# Altium PCB PCB1.PcbDoc
Units mil, origin at the board's own origin, x right, y up, seen from the top; angles counter-clockwise.
Board outline 3690.03 x 3075.03 mil, 2 copper layers (Top Layer, Bottom Layer); 36 components, 50 nets, 286 pads, 56 vias.
Unrouted connection lines stored in the file: 4.
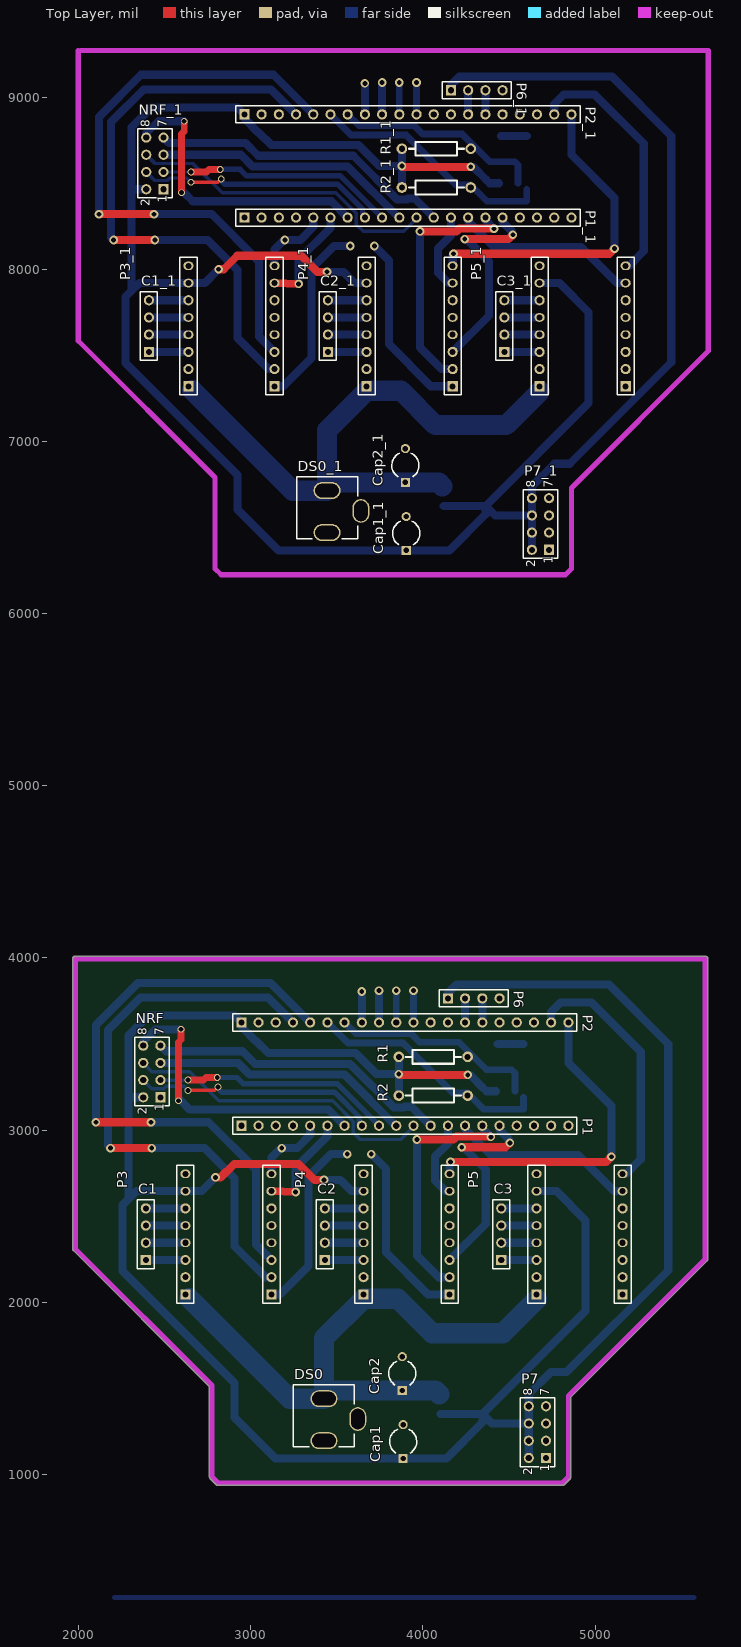
[diagram p0: Top Layer view]
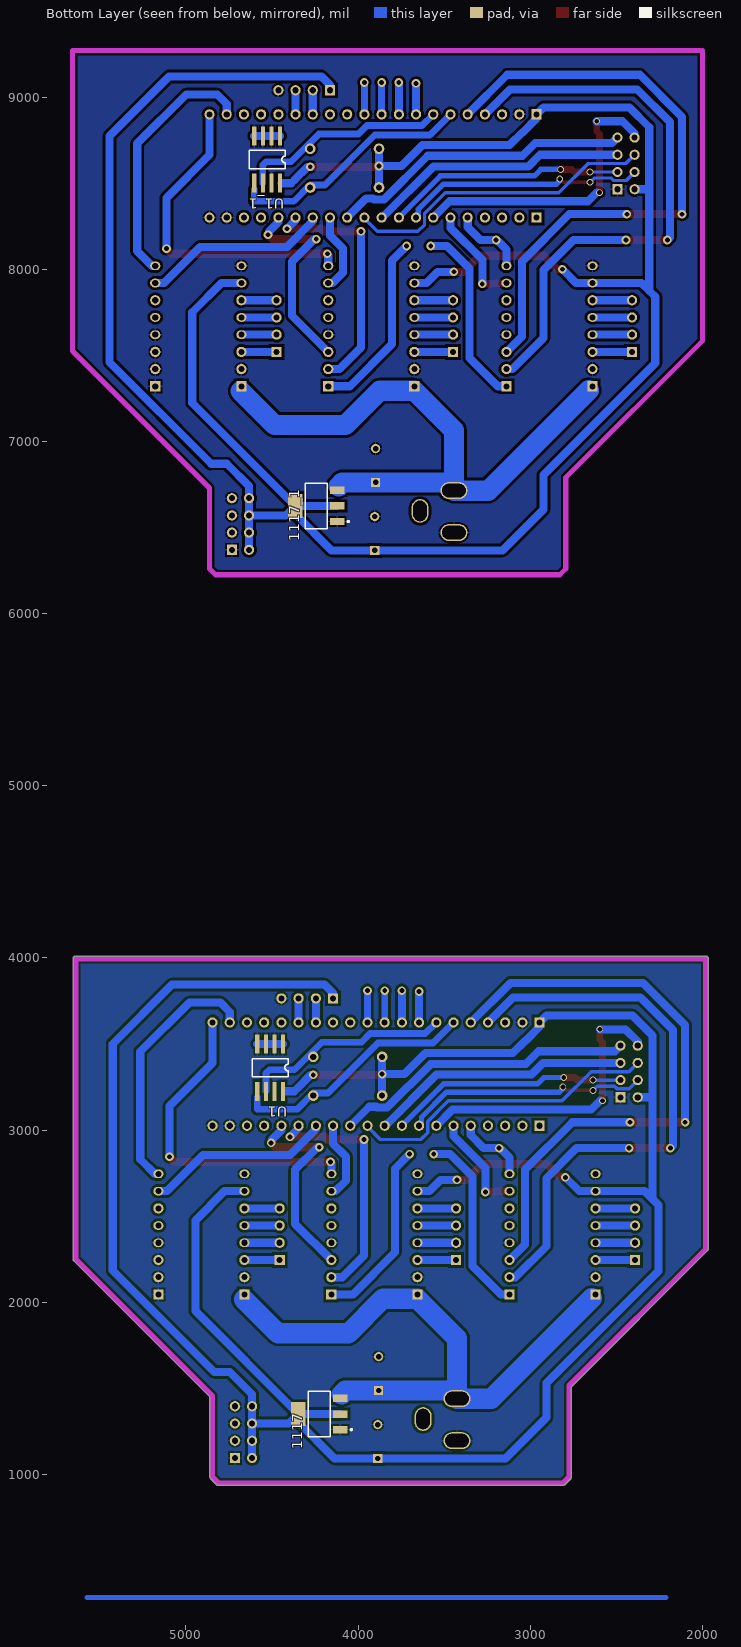
[diagram p1: Bottom Layer view, seen from below]

## Layer stack, top to bottom
Top Solder: solder mask 0.4, Solder Resist, Dk 3.5
Top Layer: signal copper 1.4
Dielectric 1: dielectric 12.6, FR-4, Dk 4.8
Bottom Layer: signal copper 1.4
Bottom Solder: solder mask 0.4, Solder Resist, Dk 3.5

## Board outline
2759.99,985 ccw(c2775,985) 2764.4,974.37 2764.38,974.38 2799.38,939.38 2799.37,939.4 ccw(c2810,950) 2810,934.99 3880,934.99 ccw(c3880,950) 3885,935.84 ccw(c3890,950) 3890,934.99 4810,934.99 ccw(c4810,950) 4820.63,939.4 4820.62,939.38 4855.62,974.38 4855.6,974.37 ccw(c4845,985) 4860.02,985 4860.02,1448.78 5650.62,2239.38 5650.6,2239.37 ccw(c5640,2250) 5655.02,2250 5655.02,3995 ccw(c5640,3995) 5640,4010.01 1995,4010.01 ccw(c1995,3995) 1987.5,4008.01 ccw(c1980,3995) 1964.98,3995 1964.98,2310 ccw(c1980,2310) 1969.4,2299.37 1969.38,2299.38 2759.99,1508.78

## Design rules (kind name [scope] priority, off if disabled: settings)
Clearance [All] p1: gap=15
PolygonConnect [All] p1: connectstyle=Relief reliefconductorwidth=10 reliefentries=4 polygonreliefangle="90 Angle" airgapwidth=10
RoutingVias [All] p1: holewidth=28 width=50 viastyle="Through Hole" minholewidth=28 minwidth=50 maxholewidth=28 maxwidth=50
SolderMaskExpansion [All] p1: expansion=4
Width [All] p1: maxlimit=118.11 minlimit=19.68 preferedwidth=47.24
30 further rules are at their usual default settings.

## Classes and differential pairs
component class Sheet1: 1117 C1 C2 C3 Cap1 Cap2 DS0 NRF P1 P2 P3 P4 P5 P6 P7 R1 R2 U1

## Components (designator, comment, footprint, x,y, rotation, side; value= is the part's Value field where it differs from the comment)
1117 "Header 4" SOT-223 4225,1350 r90 bottom
1117_1 "Header 4" SOT-223 4242.82,6625.57 r90 bottom (schematic designator 1117)
C1 "Header 4" HDR1X4 2390,2245 r90 top
C1_1 "Header 4" HDR1X4 2407.82,7520.57 r90 top (schematic designator C1)
C2 "Header 4" HDR1X4 3430,2245 r90 top
C2_1 "Header 4" HDR1X4 3447.82,7520.57 r90 top (schematic designator C2)
C3 "Header 4" HDR1X4 4455,2245 r90 top
C3_1 "Header 4" HDR1X4 4472.82,7520.57 r90 top (schematic designator C3)
Cap1 "Cap2" CAPR5-4X5 3885,1190 r90 top
Cap1_1 "Cap2" CAPR5-4X5 3902.82,6465.57 r90 top (schematic designator Cap1)
Cap2 "Cap2" CAPR5-4X5 3880,1585 r90 top
Cap2_1 "Cap2" CAPR5-4X5 3897.82,6860.57 r90 top (schematic designator Cap2)
DS0 "BATTERY" 9V 3425,1439.37 r0 top
DS0_1 "BATTERY" 9V 3442.82,6714.94 r0 top (schematic designator DS0)
NRF "Header 4X2" HDR2X4 2475,3190 r90 top
NRF_1 "Header 4X2" HDR2X4 2492.82,8465.57 r90 top (schematic designator NRF)
P1 "Header 20" HDR1X20 2945,3025 r0 top
P1_1 "Header 20" HDR1X20 2962.82,8300.57 r0 top (schematic designator P1)
P2 "Header 20" HDR1X20 2945,3625 r0 top
P2_1 "Header 20" HDR1X20 2962.82,8900.57 r0 top (schematic designator P2)
P3 "Header 8X2A" PCBComponent_1 3174,2804 r180 top
P3_1 "Header 8X2A" PCBComponent_1 3191.82,8079.57 r180 top (schematic designator P3)
P4 "Header 8X2A" PCBComponent_1 4209,2804 r180 top
P4_1 "Header 8X2A" PCBComponent_1 4226.82,8079.57 r180 top (schematic designator P4)
P5 "Header 8X2A" PCBComponent_1 5214,2804 r180 top
P5_1 "Header 8X2A" PCBComponent_1 5231.82,8079.57 r180 top (schematic designator P5)
P6 "Header 4" HDR1X4 4145,3765 r0 top
P6_1 "Header 4" HDR1X4 4162.82,9040.57 r0 top (schematic designator P6)
P7 "Header 4X2" HDR2X4 4715,1095 r90 top
P7_1 "Header 4X2" HDR2X4 4732.82,6370.57 r90 top (schematic designator P7)
R1 "Res2" R1/4 4260,3425 r180 top
R1_1 "Res2" R1/4 4277.82,8700.57 r180 top (schematic designator R1)
R2 "Res2" R1/4 4260,3200 r180 top
R2_1 "Res2" R1/4 4277.82,8475.57 r180 top (schematic designator R2)
U1 "AT24C02" SOIC8P 4435,3480 r0 bottom
U1_1 "AT24C02" SOIC8P 4452.82,8755.57 r0 bottom (schematic designator U1)

## Footprints (in the part's own frame and the unit in brackets; to place one, negate y for a bottom-side part, rotate by r counter-clockwise, add the part's x,y. Pads: shape width x height; smd on the part's side, far side on the other; paste and mask are expansions set on the pad)
9V [mm]
  oval 4x2.5 hole 2 slot 3.5 at 0 deg: 1(0,-6.207) 2(0,-0.007)
  oval 2.5x3.5 hole 2 slot 3 at 90 deg: 3(5,-3.007)
  silkscreen extent -4.5,-7.11 4.5,2.03, body extent -4.38,-13.84 5.14,0.76, height 10.92
CAPR5-4X5 [mm] "Capacitor; 2 Leads"
  rect 1.35x1.35 hole 0.8: 1(-2.5,0)
  round 1.35 hole 0.8: 2(2.5,0)
  silkscreen extent -1.69,-2 1.82,2
HDR1X4 [mm] "Connector; Header; 4 Position"
  rect 1.5x1.5 hole 0.9: 1(0,0)
  round 1.5 hole 0.9: 2(2.54,0) 3(5.08,0) 4(7.62,0)
  silkscreen extent -1.27,-1.27 8.89,1.27
HDR1X20 [mm] "Connector; Header; 20 Position"
  rect 1.5x1.5 hole 0.9: 1(0,0)
  round 1.5 hole 0.9: 2(2.54,0) 3(5.08,0) 4(7.62,0) 5(10.16,0) 6(12.7,0) 7(15.24,0) 8(17.78,0) 9(20.32,0) 10(22.86,0) 11(25.4,0) 12(27.94,0) 13(30.48,0) 14(33.02,0) 15(35.56,0) 16(38.1,0) 17(40.64,0) 18(43.18,0) 19(45.72,0) 20(48.26,0)
  silkscreen extent -1.27,-1.27 49.53,1.27
HDR2X4 [mm] "Connector; Header; 4x2 Position"
  rect 1.5x1.5 hole 0.9: 1(0,0)
  round 1.5 hole 0.9: 2(0,2.54) 3(2.54,0) 4(2.54,2.54) 5(5.08,0) 6(5.08,2.54) 7(7.62,0) 8(7.62,2.54)
  silkscreen extent -1.27,-1.27 8.89,3.81
PCBComponent_1 [mm] "Connector; Header; 8x2 Position"
  rect 1.5x1.5 hole 0.9: 1(1.372,19.279) 9(14.072,19.279)
  round 1.5 hole 0.9: 2(1.372,16.739) 3(1.372,14.199) 6(1.372,6.579) 10(14.072,16.739) 11(14.072,14.199) 14(14.072,6.579)
  oval 1.5x1.27 hole 0.9: 4(1.372,11.659) 5(1.372,9.119) 7(1.372,4.039) 8(1.372,1.499) 12(14.072,11.659) 13(14.072,9.119) 15(14.072,4.039) 16(14.072,1.499)
  silkscreen extent 0.1,0.23 15.34,20.55, body extent 0.1,0.23 15.21,20.55, height 0.7
R1/4 [mil]
  round 62 hole 35.43: 1(0,0) 2(400,0)
  silkscreen extent 40,-40 360,40
SOIC8P [mil]
  rect 24x110 smd: 1(0,-20) 2(50,-20) 3(100,-20) 4(150,-20) 5(150,255) 6(100,255) 7(50,255) 8(0,255)
  silkscreen extent -30,65 180,170, body extent -24,-4 174,234, height 63
SOT-223 [mm] "SOT-223/SC-73; 4 Leads; Body 6.7 x 7.3 mm, inc. leads (LxW max)"
  rect 1.1x2.15 smd: 1(-2.3,-3.1) 2(0,-3.1) 3(2.3,-3.1)
  rect 3.5x2.15 smd: 4(0,3.1)
  silkscreen extent -3.35,-4.85 3.35,1.63, body extent -3.25,-3.58 3.25,3.38, height 1.65

## Part data
1117 1117_1 C1 C1_1 C2 C2_1 C3 C3_1 P6 P6_1: "Header, 4-Pin"
Cap1 Cap1_1 Cap2 Cap2_1: "Capacitor"
NRF NRF_1 P7 P7_1: "Header, 4-Pin, Dual row"
P1 P1_1 P2 P2_1: "Header, 20-Pin"
P3 P3_1 P4 P4_1 P5 P5_1: "Header, 8-Pin, Dual row"
R1 R1_1 R2 R2_1: "Resistor"
U1 U1_1: "EEROM存储器"

## Via types
v1: diameter 50, hole 28, Top Layer to Bottom Layer, 44 vias
v2: diameter 39.37, hole 28, Top Layer to Bottom Layer, 12 vias

## Nets (pads, with @x,y where several pads share a name; then routed paths per layer and width w, separated by ;. In a path a pad name is that pad's centre, name@x,y a point inside that pad or via, vN(x,y) a via of type N, cw(c..) or ccw(c..) an arc to the next point about the centre after c; other vN are vias at no path point)
3V3: 1117.2 1117.4 Cap1.1 NRF.2 P1.18 P2.1 P3.15 P4.15 P5.15 P6.1 P7.2 P7.4 P7.6 P7.8 R1.2 R2.2 U1.8 | length 14843.7
  Top Layer w47.24: v1(2795,2725) 2825,2725 2903.62,2803.62 3276.38,2803.62 3370,2710 v1(3425,2710) ; v1(3860,3325) 3865,3320 v1(4260,3320)
  Bottom Layer w47.24: NRF.2 2290,3190 ; v1@2790,2720 2715,2645 P3.15 2335,2645 2290,2600 ; v1(3425,2710) 3520,2710 3585,2645 P4.15 ; R2.2 v1@3860,3310 ; R1.2 v1(3860,3325) 3730,3325 3608.31,3446.69 3101.33,3446.69 3028.03,3520 3025,3520 2945,3600 P2.1 2905,3665 2405,3665 2290,3550 2290,3190 ; 1117.2 1117.4 ; P6.1 4145,3795 4195,3845 5080,3845 5425,3500 5425,2185 4835,1595 4745,1595 4615,1465 P7.8 P7.6 ; v1(4260,3320) 4275,3320 4350,3245 ; 4370,3225 U1.8@4425,3225 ; P7.2 P7.4 P7.6 ; P5.15@4680,2645 4775,2645 4945,2475 4945,1947.95 1117.4 ; 2290,2600 2290,3190 ; 2290,2600 2255,2565 2255,2180 2905,1530 2905,1330 3143.43,1091.57 Cap1.1 4136.57,1091.57 4347.05,1302.05 1117.4 ; 1117.4 4402.05,1295 P7.6
5V: P2.3
20V: 1117.3 Cap2.1 DS0.2 P3.9 P4.9 P5.9 | length 3571.1
  Bottom Layer w118.11: P3.9@2642.5,2022.5 3225.91,1439.09 DS0.2 ; 4095,1465 4073.43,1486.57 Cap2.1 3472.48,1486.57 DS0.2 ; P5.9@4662.5,2017.5 4465,1820 4055,1820 3855,2020 3655,2020 3425,1790 DS0.2
DIRX: P1.5 P3.8 | length 416.8
  Bottom Layer w47.24: P3.8 3120,2840 v1@3170,2890 ; v1(3180,2895) 3270,2895 3345,2970 P1.5
DIRY: P2.20 P4.8 | length 1881
  Top Layer w47.24: v1(4160,2815) 5065,2815 v1(5095,2845)
  Bottom Layer w47.24: P4.8 v1@4155,2805 ; P2.20 4845,3390 5095,3140 v1@5095,2855
DIRZ: P2.19 P5.8 | length 1466
  Bottom Layer w47.24: P2.19 4745,3685 4800,3740 4980,3740 5265,3455 5265,2830 P5.8@5180,2745
GND: 1117.1 Cap1.2 Cap2.2 DS0.1 NRF.1 P1.19 P1.20 P2.2 P3.4 P3.10 P3.16 P4.4 P4.10 P4.16 P5.1 P5.2 P5.3 P5.4 P5.10 P5.16 P6.4 P7.1 P7.3 P7.5 P7.7 U1.1 U1.2 U1.3 U1.4 U1.7 | length 150
  Bottom Layer w47.24: U1.1 U1.4
NetC1_1: C1.1 P3.11 | length 230
  Bottom Layer w47.24: C1.1 P3.11
NetC1_2: C1.2 P3.12 | length 230
  Bottom Layer w47.24: C1.2 P3.12
NetC1_3: C1.3 P3.13 | length 230
  Bottom Layer w47.24: C1.3 P3.13
NetC1_4: C1.4 P3.14 | length 230
  Bottom Layer w47.24: C1.4 P3.14
NetC2_1: C2.1 P4.11 | length 225
  Bottom Layer w47.24: C2.1 P4.11
NetC2_2: C2.2 P4.12 | length 225
  Bottom Layer w47.24: C2.2 P4.12
NetC2_3: C2.3 P4.13 | length 225
  Bottom Layer w47.24: C2.3 P4.13
NetC2_4: C2.4 P4.14 | length 225
  Bottom Layer w47.24: C2.4 P4.14
NetC3_1: C3.1 P5.11 | length 205
  Bottom Layer w47.24: C3.1 P5.11
NetC3_2: C3.2 P5.12 | length 205
  Bottom Layer w47.24: C3.2 P5.12
NetC3_3: C3.3 P5.13 | length 205
  Bottom Layer w47.24: C3.3 P5.13
NetC3_4: C3.4 P5.14 | length 205
  Bottom Layer w47.24: C3.4 P5.14
NRF_CE: NRF.3 P1.9 | length 1382.8
  Top Layer w39.37: v2(2635,3290) 2725,3290 2740,3305 v2(2805,3305)
  Bottom Layer w19.68: NRF.3 v2@2625,3290
  Bottom Layer w31.5: v2(2805,3305) 2920,3305 2957.17,3267.83 3503.25,3267.83 3745,3026.09 P1.9
NRF_CSN: NRF.4 P1.8 | length 1427.7
  Top Layer w19.68: v2(2635,3230) 2790,3230 v2(2810,3250)
  Bottom Layer w19.68: NRF.4 2424.37,3240.63 2495.45,3240.63 2509.82,3255 2610,3255 v2@2630,3235
  Bottom Layer w31.5: v2(2810,3250) 2810,3240 2830,3220 3485.33,3220 3631.22,3074.11 3631.22,3038.78 P1.8
NRF_IRQ: NRF.8 P1.7 | length 1705.3
  Top Layer w39.37: v2(2580,3170) 2580,3510 2595,3525 v2(2595,3585)
  Bottom Layer w47.24: NRF.8 2375,3515 2445,3585 v2(2595,3585) ; v2@2595,3170 2645,3120 3450,3120 P1.7
NRF_MISO: NRF.7 P1.12 | length 1766.8
  Bottom Layer w47.24: NRF.7 2507.24,3457.76 2952.24,3457.76 3025.55,3384.45 3577.09,3384.45 3831.16,3130.38 3888.84,3130.38 3893.84,3135.38 3934.62,3135.38 P1.12
NRF_MOSI: NRF.6 P1.11 | length 1855.5
  Bottom Layer w19.68: NRF.6 2425.63,3339.37 2645.63,3339.37 2815,3170 3475,3170 3595.63,3049.37 3595.63,2984.37 3635,2945 3870,2945 3950,3025 P1.11 P1.11@3925,3025
NRF_SCK: NRF.5 P1.10 | length 1521.2
  Bottom Layer w47.24: NRF.5 2925,3390 2992.8,3322.2 3544.17,3322.2 3841.38,3025 P1.10
NRST: P1.17
PA1: P1.6 P3.7 | length 601.7
  Top Layer w47.24: P3.7 v1(3260,2640)
  Bottom Layer w47.24: v1(3260,2640) 3260,2780 3445,2965 P1.6
PA8: P2.16
PA9: P2.15 P6.3 | length 140
  Bottom Layer w47.24: P2.15 P6.3
PA10: P2.14 P6.2 | length 140
  Bottom Layer w47.24: P2.14 P6.2
PA11: P2.13
PA12: P2.12
PA15: P2.11 | length 185
  Bottom Layer w39.37: P2.11 v1(3945,3810)
PB0: P1.13 P4.7 | length 460.9
  Bottom Layer w47.24: P1.13 4145,2920 4070,2845 4070,2705 4130,2645 P4.7
PB1: P1.14 P5.7 | length 1084.1
  Bottom Layer w47.24: P1.14 4245,3005 4395,2855 4900,2855 5110,2645 P5.7
PB3: P2.10 | length 185
  Bottom Layer w39.37: P2.10 v1(3845,3810)
PB4: P2.9 P4.1 | length 1246.7
  Bottom Layer w47.24: v1(3700,2860) 3785,2775 3785,2290 4030,2045 P4.1 ; P2.9 v1@3745,3795
  other v1: 3745,3810
PB5: P2.8 P3.1 | length 1247.2
  Bottom Layer w47.24: P3.1 3170,2045 3335,2210 3335,2730 3465,2860 v1(3560,2860) ; P2.8 v1@3645,3790
  other v1: 3645,3805
PB6: P2.7 R1.1 U1.6 | length 1217.2
  Bottom Layer w39.37: P2.7 3610,3560 3930,3560 3980,3510 4210,3510 4370,3350 4515,3350 4535,3330 U1.6
PB7: P2.6 R2.1 U1.5 | length 1419.2
  Bottom Layer w39.37: P2.6 3565,3505 3885,3505 4175,3215 4260,3215 4355,3120 4585,3120 U1.5@4585,3190
PB8: P2.5 P3.3 | length 3612.9
  Top Layer w47.24: v1(2100,3045) v1(2420,3045)
  Bottom Layer w47.24: v1(2100,3045) 2100,3610 2345,3855 3115,3855 P2.5 ; v1(2420,3045) 2755,3045 3030,2770 3030,2335 P3.3
PB9: P2.4 P3.2 | length 3382
  Top Layer w47.24: v1(2185,2895) v1(2425,2895)
  Bottom Layer w47.24: v1(2185,2895) 2170,2910 2170,3580 2360,3770 3100,3770 P2.4 ; v1(2425,2895) 2730,2895 2905,2720 2905,2325 3085,2145 P3.2
PB10: P1.15 P4.2 | length 1440.2
  Top Layer w47.24: v1(3965,2945) 4177.1,2945 4193.95,2961.85 4393.15,2961.85 v1(4395,2960)
  Bottom Layer w47.24: v1(3965,2945) 3965,2270 4090,2145 P4.2 ; P1.15 4345,3010 v1(4395,2960)
PB11: P1.16 P4.3 | length 1199
  Top Layer w47.24: v1(4225,2900) 4480,2900 v1(4505,2925)
  Bottom Layer w47.24: P4.3 4365,2455 4365,2770 4235,2900 v1(4225,2900) ; P1.16 4445,3000 v1@4500,2945
PB14: P2.18
PB15: P2.17
PC13: P1.2
PC14: P1.3
PC15: P1.4
VBAT: P1.1
pads on no net: 1117_1.1 1117_1.2 1117_1.3 1117_1.4 C1_1.1 C1_1.2 C1_1.3 C1_1.4 C2_1.1 C2_1.2 C2_1.3 C2_1.4 C3_1.1 C3_1.2 C3_1.3 C3_1.4 Cap1_1.1 Cap1_1.2 Cap2_1.1 Cap2_1.2 DS0.3 DS0_1.1 DS0_1.2 DS0_1.3 NRF_1.1 NRF_1.2 NRF_1.3 NRF_1.4 NRF_1.5 NRF_1.6 NRF_1.7 NRF_1.8 P1_1.1 P1_1.2 P1_1.3 P1_1.4 P1_1.5 P1_1.6 P1_1.7 P1_1.8 P1_1.9 P1_1.10 P1_1.11 P1_1.12 P1_1.13 P1_1.14 P1_1.15 P1_1.16 P1_1.17 P1_1.18 P1_1.19 P1_1.20 P2_1.1 P2_1.2 P2_1.3 P2_1.4 P2_1.5 P2_1.6 P2_1.7 P2_1.8 P2_1.9 P2_1.10 P2_1.11 P2_1.12 P2_1.13 P2_1.14 P2_1.15 P2_1.16 P2_1.17 P2_1.18 P2_1.19 P2_1.20 P3.5 P3.6 P3_1.1 P3_1.2 P3_1.3 P3_1.4 P3_1.5 P3_1.6 P3_1.7 P3_1.8 P3_1.9 P3_1.10 P3_1.11 P3_1.12 P3_1.13 P3_1.14 P3_1.15 P3_1.16 P4.5 P4.6 P4_1.1 P4_1.2 P4_1.3 P4_1.4 P4_1.5 P4_1.6 P4_1.7 P4_1.8 P4_1.9 P4_1.10 P4_1.11 P4_1.12 P4_1.13 P4_1.14 P4_1.15 P4_1.16 P5.5 P5.6 P5_1.1 P5_1.2 P5_1.3 P5_1.4 P5_1.5 P5_1.6 P5_1.7 P5_1.8 P5_1.9 P5_1.10 P5_1.11 P5_1.12 P5_1.13 P5_1.14 P5_1.15 P5_1.16 P6_1.1 P6_1.2 P6_1.3 P6_1.4 P7_1.1 P7_1.2 P7_1.3 P7_1.4 P7_1.5 P7_1.6 P7_1.7 P7_1.8 R1_1.1 R1_1.2 R2_1.1 R2_1.2 U1_1.1 U1_1.2 U1_1.3 U1_1.4 U1_1.5 U1_1.6 U1_1.7 U1_1.8
copper on no net: | length 55554
  Top Layer w19.68: v2(2652.82,8505.57) 2807.82,8505.57 v2(2827.82,8525.57)
  Top Layer w39.37: v2(2597.82,8445.57) 2597.82,8785.57 2612.82,8800.57 v2(2612.82,8860.57) ; v2(2652.82,8565.57) 2742.82,8565.57 2757.82,8580.57 v2(2822.82,8580.57)
  Top Layer w47.24: v1(2117.82,8320.57) v1(2437.82,8320.57) ; v1(2202.82,8170.57) v1(2442.82,8170.57) ; v1(2812.82,8000.57) 2842.82,8000.57 2921.44,8079.19 3294.2,8079.19 3387.82,7985.57 v1(3442.82,7985.57) ; 3137.82,7920.57 v1(3277.82,7915.57) ; v1(3877.82,8600.57) 3882.82,8595.57 v1(4277.82,8595.57) ; v1(3982.82,8220.57) 4194.92,8220.57 4211.77,8237.42 4410.97,8237.42 v1(4412.82,8235.57) ; v1(4177.82,8090.57) 5082.82,8090.57 v1(5112.82,8120.57) ; v1(4242.82,8175.57) 4497.82,8175.57 v1(4522.82,8200.57)
  Bottom Layer w19.68: 2392.82,8565.57 2442.19,8516.2 2513.27,8516.2 2527.64,8530.57 2627.82,8530.57 v2@2647.82,8510.57 ; 2392.82,8665.57 2443.45,8614.94 2663.45,8614.94 2832.82,8445.57 3492.82,8445.57 3613.45,8324.94 3613.45,8259.94 3652.82,8220.57 3887.82,8220.57 3967.82,8300.57 3962.82,8300.57 3942.82,8300.57 ; 2492.82,8565.57 v2@2642.82,8565.57
  Bottom Layer w30: 2210,285 5575,285
  Bottom Layer w31.5: v2(2822.82,8580.57) 2937.82,8580.57 2974.99,8543.41 3521.07,8543.41 3762.82,8301.66 3762.82,8300.57 ; v2(2827.82,8525.57) 2827.82,8515.57 2847.82,8495.57 3503.15,8495.57 3649.04,8349.68 3649.04,8314.35 3662.82,8300.57
  Bottom Layer w39.37: 3462.82,8900.57 3582.82,8780.57 3902.82,8780.57 4192.82,8490.57 4277.82,8490.57 4372.82,8395.57 4602.82,8395.57 4602.82,8465.57 ; 3562.82,8900.57 3627.82,8835.57 3947.82,8835.57 3997.82,8785.57 4227.82,8785.57 4387.82,8625.57 4532.82,8625.57 4552.82,8605.57 4552.82,8500.57 ; 3862.82,8900.57 v1(3862.82,9085.57) ; 3962.82,8900.57 v1(3962.82,9085.57)
  Bottom Layer w47.24: v1(2117.82,8320.57) 2117.82,8885.57 2362.82,9130.57 3132.82,9130.57 3362.82,8900.57 ; v1(2202.82,8170.57) 2187.82,8185.57 2187.82,8855.57 2377.82,9045.57 3117.82,9045.57 3262.82,8900.57 ; 2392.82,8465.57 2307.82,8465.57 ; 2392.82,8765.57 2392.82,8790.57 2462.82,8860.57 v2(2612.82,8860.57) ; 2407.82,7520.57 2637.82,7520.57 ; 2407.82,7620.57 2637.82,7620.57 ; 2407.82,7720.57 2637.82,7720.57 ; 2407.82,7820.57 2637.82,7820.57 ; v1(2437.82,8320.57) 2772.82,8320.57 3047.82,8045.57 3047.82,7610.57 3137.82,7520.57 ; v1(2442.82,8170.57) 2747.82,8170.57 2922.82,7995.57 2922.82,7600.57 3102.82,7420.57 3137.82,7420.57 ; 2492.82,8665.57 2942.82,8665.57 3010.62,8597.78 3561.99,8597.78 3859.2,8300.57 3862.82,8300.57 ; 2492.82,8765.57 2525.07,8733.33 2970.07,8733.33 3043.37,8660.02 3594.91,8660.02 3848.98,8405.95 3906.66,8405.95 3911.66,8410.95 3952.44,8410.95 4062.82,8300.57 ; v2@2612.82,8445.57 2662.82,8395.57 3467.82,8395.57 3562.82,8300.57 ; v1@2807.82,7995.57 2732.82,7920.57 2637.82,7920.57 2352.82,7920.57 2307.82,7875.57 ; 3137.82,7320.57 3187.82,7320.57 3352.82,7485.57 3352.82,8005.57 3482.82,8135.57 v1(3577.82,8135.57) ; 3137.82,8020.57 3137.82,8115.57 v1@3187.82,8165.57 ; v1(3197.82,8170.57) 3287.82,8170.57 3362.82,8245.57 3362.82,8300.57 ; v1(3277.82,7915.57) 3277.82,8055.57 3462.82,8240.57 3462.82,8300.57 ; v1(3442.82,7985.57) 3537.82,7985.57 3602.82,7920.57 3672.82,7920.57 ; 3447.82,7520.57 3672.82,7520.57 ; 3447.82,7620.57 3672.82,7620.57 ; 3447.82,7720.57 3672.82,7720.57 ; 3447.82,7820.57 3672.82,7820.57 ; 3662.82,8900.57 v1@3662.82,9065.57 ; v1(3717.82,8135.57) 3802.82,8050.57 3802.82,7565.57 4047.82,7320.57 4172.82,7320.57 ; 3762.82,8900.57 v1@3762.82,9070.57 ; 3877.82,8475.57 v1@3877.82,8585.57 ; 3877.82,8700.57 v1(3877.82,8600.57) 3747.82,8600.57 3626.13,8722.27 3119.15,8722.27 3045.85,8795.57 3042.82,8795.57 2962.82,8875.57 2962.82,8900.57 2922.82,8940.57 2422.82,8940.57 2307.82,8825.57 2307.82,8465.57 ; v1(3982.82,8220.57) 3982.82,7545.57 4107.82,7420.57 4172.82,7420.57 ; 4120.77,6625.57 4364.87,6625.57 ; 4162.82,8300.57 4162.82,8195.57 4087.82,8120.57 4087.82,7980.57 4147.82,7920.57 4172.82,7920.57 ; 4162.82,9040.57 4162.82,9070.57 4212.82,9120.57 5097.82,9120.57 5442.82,8775.57 5442.82,7460.57 4852.82,6870.57 4762.82,6870.57 4632.82,6740.57 4632.82,6670.57 4632.82,6570.57 ; 4172.82,7520.57 4382.82,7730.57 4382.82,8045.57 4252.82,8175.57 v1(4242.82,8175.57) ; 4172.82,8020.57 v1@4172.82,8080.57 ; 4262.82,8300.57 4262.82,8280.57 4412.82,8130.57 4917.82,8130.57 5127.82,7920.57 5177.82,7920.57 ; 4262.82,8900.57 4262.82,9040.57 ; v1(4277.82,8595.57) 4292.82,8595.57 4367.82,8520.57 ; 4362.82,8300.57 4362.82,8285.57 v1(4412.82,8235.57) ; 4362.82,8900.57 4362.82,9040.57 ; 4387.82,8500.57 4442.82,8500.57 ; 4452.82,8775.57 4602.82,8775.57 ; 4462.82,8300.57 4462.82,8275.57 v1@4517.82,8220.57 ; 4472.82,7520.57 4677.82,7520.57 ; 4472.82,7620.57 4677.82,7620.57 ; 4472.82,7720.57 4677.82,7720.57 ; 4472.82,7820.57 4677.82,7820.57 ; 4632.82,6370.57 4632.82,6470.57 4632.82,6570.57 ; 4697.82,7920.57 4792.82,7920.57 4962.82,7750.57 4962.82,7223.53 4364.87,6625.57 ; 4762.82,8900.57 4762.82,8960.57 4817.82,9015.57 4997.82,9015.57 5282.82,8730.57 5282.82,8105.57 5197.82,8020.57 ; 4862.82,8900.57 4862.82,8665.57 5112.82,8415.57 v1@5112.82,8130.57 ; 2307.82,7875.57 2272.82,7840.57 2272.82,7455.57 2922.82,6805.57 2922.82,6605.57 3161.25,6367.15 3902.82,6367.15 4154.4,6367.15 4364.87,6577.62 4364.87,6625.57 ; 2307.82,7875.57 2307.82,8465.57 ; 4364.87,6625.57 4419.87,6570.57 4632.82,6570.57
  Bottom Layer w118.11: 2660.32,7298.07 3243.73,6714.67 3442.82,6714.67 ; 4112.82,6740.57 4091.25,6762.15 3897.82,6762.15 3490.3,6762.15 3442.82,6714.67 ; 4680.32,7293.07 4482.82,7095.57 4072.82,7095.57 3872.82,7295.57 3672.82,7295.57 3442.82,7065.57 3442.82,6714.67
  other v1: 3662.82,9080.57 3762.82,9085.57

## Polygon pours and split planes (outlines as drawn)
no net on Bottom Layer "AutoNaming" (solid, remove dead copper, pour order 2): 1997.82,9270.57 2007.82,9260.57 5657.82,9260.57 5657.82,7525.57 4862.82,6730.57 4862.82,6715.57 4862.82,6260.57 4845.32,6243.07 4832.82,6255.57 2797.82,6255.57 2797.82,6785.57 2792.82,6790.57 1992.82,7590.57 1987.82,7590.57
GND on Bottom Layer "AutoNaming" (solid, remove dead copper, pour order 0): 1980,3995 1990,3985 5640,3985 5640,2250 4845,1455 4845,1440 4845,985 4827.5,967.5 4815,980 2780,980 2780,1510 2775,1515 1975,2315 1970,2315

## Keep-outs
Keep-Out Layer:
  lines w30: 1980,3995 1980,2310 2775,1515 2775,985 2810,950 3880,950 ; 1995,3995 5640,3995 5640,2250 4845,1455 4845,985 4810,950 3890,950 ; 1997.82,9270.57 1997.82,7585.57 2792.82,6790.57 2792.82,6260.57 2827.82,6225.57 3897.82,6225.57 ; 2012.82,9270.57 5657.82,9270.57 5657.82,7525.57 4862.82,6730.57 4862.82,6260.57 4827.82,6225.57 3907.82,6225.57

## Text inside footprints (layer, text, board x,y; h text height)
NRF: Top Overlay "2" at 2395,3090 h50 r90; Top Overlay "1" at 2495,3110 h50 r90; Top Overlay "7" at 2495,3550 h50 r90; Top Overlay "8" at 2395,3550 h50 r90
NRF_1: Top Overlay "2" at 2412.82,8365.57 h50 r90; Top Overlay "1" at 2512.82,8385.57 h50 r90; Top Overlay "7" at 2512.82,8825.57 h50 r90; Top Overlay "8" at 2412.82,8825.57 h50 r90
P7: Top Overlay "2" at 4635,995 h50 r90; Top Overlay "1" at 4735,1015 h50 r90; Top Overlay "7" at 4735,1455 h50 r90; Top Overlay "8" at 4635,1455 h50 r90
P7_1: Top Overlay "2" at 4652.82,6270.57 h50 r90; Top Overlay "1" at 4752.82,6290.57 h50 r90; Top Overlay "7" at 4752.82,6730.57 h50 r90; Top Overlay "8" at 4652.82,6730.57 h50 r90